# Altium PCB PCB1.PcbDoc (part 2 of 2)
Units mm, origin at the board's own origin, x right, y up, seen from the top; angles counter-clockwise.
Board outline 88.4 x 52.7 mm, 4 copper layers (Top Layer, Mid-Layer 1, Mid-Layer 2, Bottom Layer), stack 1.341 mm thick; 54 components, 31 nets, 188 pads, 80 vias.
Unrouted connection lines stored in the file: 1.
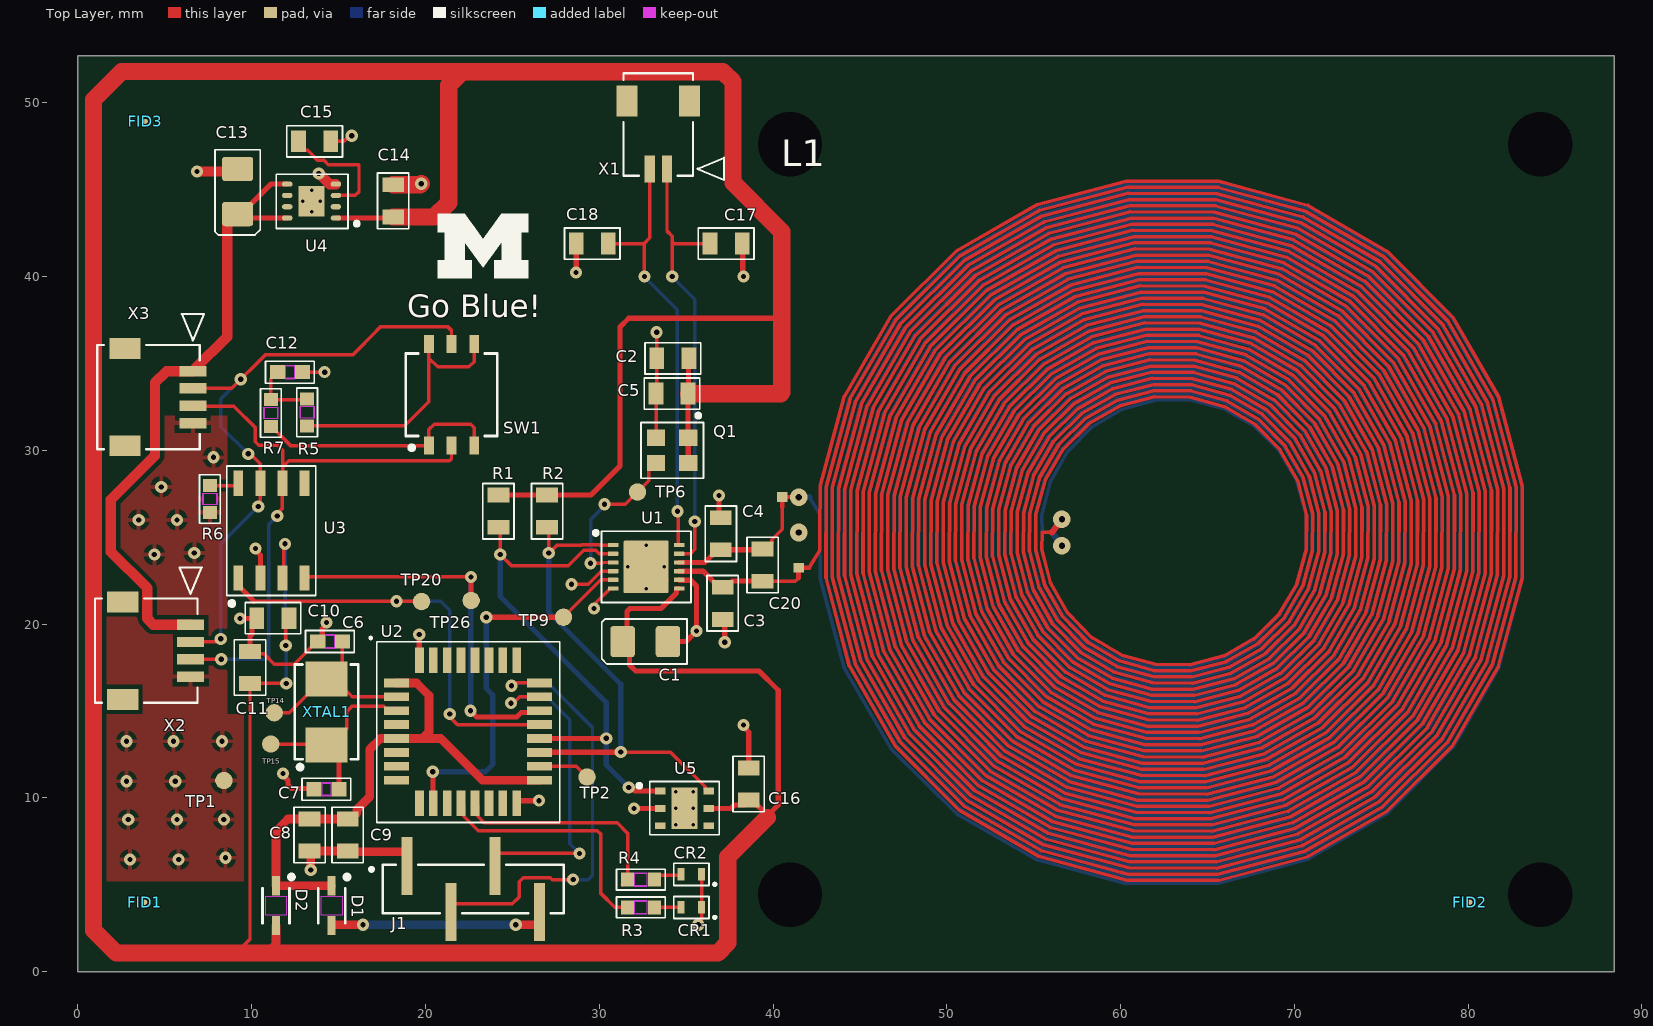
[diagram p0: Top Layer view]

## Part data (continued)
U4: library part TPS73733QDRBRQ1, "Automotive 1-A, ultra-low-dropout voltage regulator with reverse current protection & enable", Case/Package=SON, Dropout Voltage=130mV, LCSC Part#=C523768, Manufacturer="Texas Instruments", Max Operating Temperature=125°C, Max Output current=1A, Max Output Voltage=3.3V, Max Power Dissipation=2.5W, Max Supply Voltage=5.5V, Min Current Limit=1.05A, Min Input Voltage=2.2V, Min Operating Temperature=-40°C, Output Voltage Accuracy=1%, Package Quantity=1, Quiescent Current=300uA, Supplier Part Number=296-24157-1-ND, Accuracy=3%, Category="Voltage Regulators - Linear", ComponentLink1Description=https://datasheet.ciiva.com/2045/tps73719-q1-2045686.pdf?src-supplier=Digi-Key, ComponentLink1URL=https://datasheet.ciiva.com/2045/tps73719-q1-2045686.pdf?src-supplier=Digi-Key, ComponentLink2Description=https://datasheet.ciiva.com/3224/tps73733-q1-3224372.pdf?src-supplier=Avnet, ComponentLink2URL=https://datasheet.ciiva.com/3224/tps73733-q1-3224372.pdf?src-supplier=Avnet, ComponentLink3Description=https://datasheet.ciiva.com/4888/sbvs123-125968-4888332.pdf?src-supplier=Mouser, ComponentLink3URL=https://datasheet.ciiva.com/4888/sbvs123-125968-4888332.pdf?src-supplier=Mouser, ComponentLink4Description=https://datasheet.ciiva.com/14277/sbvs123-14277182.pdf?src-supplier=Avnet, ComponentLink4URL=https://datasheet.ciiva.com/14277/sbvs123-14277182.pdf?src-supplier=Avnet, Height=1mm, Lead Free="Lead Free", Length=3mm, Manufacturer Part Number=TPS73733QDRBRQ1, Min Output Voltage=3.3V, Nominal Output Voltage=3.3V, Number of Outputs=1, Number of Regulators=1, Output Current=1A, Output Type=Fixed, Output Voltage=3.3V, Packaging="Tape and Reel", Pins=8, Polarity=Positive, Power Dissipation=2.5W, Pricing="1=2.06, 10=1.847, 25=1.7424, 100=1.4844, 250=1.3938, 500=1.21958, 1000=1.0105 (USD)", Radiation Hardening=No, Reach SVHC Compliant=No, RoHS=Yes, RoHS Compliant=Yes, Series="Automotive, AEC-Q100", Stock=24609, Supplier=Digi-Key, Thickness=880um, Width=3mm
U5: library part HDC1080DMBR, "SENSOR HUMI/TEMP 3.3V I2C 4% SMD", LCSC Part#=C82227, Manufacturer="Texas Instruments", Max Operating Temperature=125°C, Min Operating Temperature=-40°C, Supplier Part Number=296-46272-6-ND, Accuracy=2%, Category="Integrated Circuits (ICs)", ComponentLink1Description=http://www.ti.com/lit/ds/symlink/hdc1080.pdf?src-supplier=Digi-Key, ComponentLink1URL=http://www.ti.com/lit/ds/symlink/hdc1080.pdf?src-supplier=Digi-Key, ComponentLink2Description=http://www.ti.com/general/docs/suppproductinfo.tsp?distId=10&amp;gotoUrl=http%3A%2F%2Fwww.ti.com%2Flit%2Fgpn%2Fhdc1080&src-supplier=Digi-Key, ComponentLink2URL=http://www.ti.com/general/docs/suppproductinfo.tsp?distId=10&amp;gotoUrl=http%3A%2F%2Fwww.ti.com%2Flit%2Fgpn%2Fhdc1080&src-supplier=Digi-Key, Interface=I2C, Lead Free="Lead Free", Manufacturer Part Number=HDC1080DMBR, Mounting Technology="Surface Mount", Output Type=I2C, Packaging="Cut Tape", Pricing="1=3.68, 10=2.759, 25=2.4524, 50=2.3296, 100=2.2684, 500=1.90052, 1000=1.7779 (USD)", Response Time=15s, RoHS=Yes, RoHS Compliant=Yes, Sensor Type=Temperature, Series=-, Stock=8356, Supplier=Digi-Key
X1: library part 202396-0207, "Conn Shrouded Header (4 Sides) HDR 2 POS 1mm Solder RA Side Entry SMD Pico-Clasp™ T/R", Flammability Rating="UL94 V-0", Insulation Color=Natural, LCSC Part#=C585325, Manufacturer=Molex, Max Operating Temperature=105°C, Min Operating Temperature=-40°C, Supplier Part Number=WM26783CT-ND, Category="Headers and Wire Housings", ComponentLink1Description=http://datasheet.octopart.com/2023960207-Molex-datasheet-147952241.pdf?src-supplier=Digi-Key, ComponentLink1URL=http://datasheet.octopart.com/2023960207-Molex-datasheet-147952241.pdf?src-supplier=Digi-Key, ComponentLink2Description=https://www.molex.com/pdm_docs/sd/2023960207_sd.pdf?src-supplier=Digi-Key, ComponentLink2URL=https://www.molex.com/pdm_docs/sd/2023960207_sd.pdf?src-supplier=Digi-Key, ComponentLink3Description=http://datasheet.octopart.com/2023960207-Molex-datasheet-147952241.pdf?src-supplier=Newark, ComponentLink3URL=http://datasheet.octopart.com/2023960207-Molex-datasheet-147952241.pdf?src-supplier=Newark, ComponentLink4Description=http://datasheet.octopart.com/2023960207-Molex-datasheet-147952241.pdf?src-supplier=Farnell, ComponentLink4URL=http://datasheet.octopart.com/2023960207-Molex-datasheet-147952241.pdf?src-supplier=Farnell, ComponentLink5Description=http://datasheet.octopart.com/2023960207-Molex-datasheet-147952241.pdf?src-supplier=Avnet, ComponentLink5URL=http://datasheet.octopart.com/2023960207-Molex-datasheet-147952241.pdf?src-supplier=Avnet, ComponentLink6Description=http://datasheet.octopart.com/2023960207-Molex-datasheet-147952241.pdf?src-supplier=Arrow+Electronics, ComponentLink6URL=http://datasheet.octopart.com/2023960207-Molex-datasheet-147952241.pdf?src-supplier=Arrow+Electronics, ComponentLink7Description=http://datasheet.octopart.com/2023960207-Molex-datasheet-147952241.pdf?src-supplier=TTI, ComponentLink7URL=http://datasheet.octopart.com/2023960207-Molex-datasheet-147952241.pdf?src-supplier=TTI, ComponentLink8Description=http://datasheet.octopart.com/2023960207-Molex-datasheet-147952241.pdf?src-supplier=Electro+Sonic, ComponentLink8URL=http://datasheet.octopart.com/2023960207-Molex-datasheet-147952241.pdf?src-supplier=Electro+Sonic, ComponentLink9Description=https://datasheet.octopart.com/202396-0207-Molex-datasheet-134623761.pdf?src-supplier=TME, ComponentLink9URL=https://datasheet.octopart.com/202396-0207-Molex-datasheet-134623761.pdf?src-supplier=TME, Connector Type=Header, Contact Finish - Mating=GOLD, Contact Material=Bronze, Contact Shape=Square, Contact Type="Male Pin", Fastening Type=Latch, Insulation Material=Nylon, Manufacturer Part Number=202396-0207, Mounting Technology="Surface Mount", Number of Positions=2, Number of Rows=1, Packaging="Tape and Reel", Pricing="1=0.97, 10=0.804, 100=0.6698 (USD)", RoHS=No, Series="Pico-Clasp 202396", Stock=6710, Supplier=Digi-Key, Termination=Solder
X2 X3: library part 202396-0407, "Conn Shrouded Header (4 Sides) HDR 4 POS 1mm Solder RA SMD Pico-Clasp™ T/R", Flammability Rating="UL94 V-0", Insulation Color=Natural, Manufacturer=Molex, Max Operating Temperature=105°C, Min Operating Temperature=-40°C, Supplier Part Number=WM26785CT-ND, Category="Headers and Wire Housings", ComponentLink1Description=http://datasheet.octopart.com/202396-0407-Molex-datasheet-134623761.pdf?src-supplier=Avnet, ComponentLink1URL=http://datasheet.octopart.com/202396-0407-Molex-datasheet-134623761.pdf?src-supplier=Avnet, ComponentLink2Description=https://www.molex.com/pdm_docs/sd/2023960407_sd.pdf?src-supplier=Digi-Key, ComponentLink2URL=https://www.molex.com/pdm_docs/sd/2023960407_sd.pdf?src-supplier=Digi-Key, ComponentLink3Description=http://datasheet.octopart.com/202396-0407-Molex-datasheet-134623761.pdf?src-supplier=Digi-Key, ComponentLink3URL=http://datasheet.octopart.com/202396-0407-Molex-datasheet-134623761.pdf?src-supplier=Digi-Key, ComponentLink4Description=http://datasheet.octopart.com/202396-0407-Molex-datasheet-134623761.pdf?src-supplier=Farnell, ComponentLink4URL=http://datasheet.octopart.com/202396-0407-Molex-datasheet-134623761.pdf?src-supplier=Farnell, ComponentLink5Description=http://datasheet.octopart.com/202396-0407-Molex-datasheet-134623761.pdf?src-supplier=Newark, ComponentLink5URL=http://datasheet.octopart.com/202396-0407-Molex-datasheet-134623761.pdf?src-supplier=Newark, ComponentLink6Description=http://datasheet.octopart.com/202396-0407-Molex-datasheet-134623761.pdf?src-supplier=Mouser, ComponentLink6URL=http://datasheet.octopart.com/202396-0407-Molex-datasheet-134623761.pdf?src-supplier=Mouser, ComponentLink7Description=http://datasheet.octopart.com/202396-0407-Molex-datasheet-134623761.pdf?src-supplier=Heilind+Electronics, ComponentLink7URL=http://datasheet.octopart.com/202396-0407-Molex-datasheet-134623761.pdf?src-supplier=Heilind+Electronics, ComponentLink8Description=http://datasheet.octopart.com/202396-0407-Molex-datasheet-134623761.pdf?src-supplier=Electro+Sonic, ComponentLink8URL=http://datasheet.octopart.com/202396-0407-Molex-datasheet-134623761.pdf?src-supplier=Electro+Sonic, Connector Type=Header, Contact Finish - Mating=GOLD, Contact Material=Bronze, Contact Shape=Square, Contact Type="Male Pin", Fastening Type=Latch, Insulation Material=Nylon, Manufacturer Part Number=202396-0407, Mounting Technology="Surface Mount", Number of Positions=4, Number of Rows=1, Packaging="Tape and Reel", Pricing="1=1.05, 10=0.869, 100=0.7238 (USD)", RoHS=No, Series="Pico-Clasp 202396", Stock=4338, Supplier=Digi-Key, Termination=Solder
XTAL1: library part XC53G2-8.000-F12NJHP, "CRYSTAL 8MHZ 12PF SMD", LCSC Part#=C2842269, Mfr_Name=HCI, Copyright="Copyright (C) 2023 Ultra Librarian. All rights reserved.", Manufacturer_Part_Number=XC53G2-8.000-F12NJHPK, RefDes=RefDes, Type=DEV

## Free pads (board coordinates)
  round 0 hole 3.7 unplated paste-5: MTH1(40.975,4.43) MTH1(40.975,47.61) MTH1(84.155,4.43) MTH1(84.155,47.61)

## Via types
v1: diameter 0.7, hole 0.3, Top Layer to Bottom Layer, 72 vias
v2: diameter 1.016/1.016/1.016/1.016 (per signal layer), hole 0.356, Top Layer to Bottom Layer, 4 vias
v3: diameter 0.3, hole 0.2, Top Layer to Bottom Layer, 4 vias

## Nets (pads, with @x,y where several pads share a name; then routed paths per layer and width w, separated by ;. In a path a pad name is that pad's centre, name@x,y a point inside that pad or via, vN(x,y) a via of type N, cw(c..) or ccw(c..) an arc to the next point about the centre after c; other vN are vias at no path point)
GND: C1.2 C2.2 C3.2 C4.2 C5.2 C6.1 C7.1 C8.2 C9.2 C10.2 C11.2 C12.2 C13.2 C14.1 C15.2 C16.2 C17.2 C18.2 CR1.1 CR2.1 J1.1 Q1.2 R6.2 TP1.1 U1.4 U1.6 U1.8 U1.13 U2.16 U2.32 U3.2 U4.4 U4.9 U5.2 U5.7 X2.4 X3.4 | length 62.6
  Top Layer w0.2: C11.2 10.047,18.287 10.713,18.287 11.3,17.7 12.456,17.7 13.756,19 C6.1 ; C12.2 v1(14.2,34.5) ; C15.2 15.311,47.784 15.626,48.099 v1(15.761,48.099) ; v1(28.4,22.3) 29.361,22.3 30.111,23.05 U1.4 ; v1(29.7,20.9) 29.796,20.996 29.796,21.221 30.625,22.05 U1.6 ; U1.13 33.1,23.3 U1.13@33.877,22.523 ; Q1.2 33.275,33.258 C5.2 33.312,33.313 C2.2 33.304,35.303 v1(33.304,36.8) ; U1.13@33.747,22.394 U1.13@33.877,22.523 ; U1.13@33.9,22.55 33.877,22.527 U1.13@33.877,22.523 ; v1(35.7,2.7) 35.7,2.835 35.897,3.032 CR2.1 ; C4.2@36.9,26.225 C4.2 ; C3.2 C3.2@37.221,20.154
  Top Layer w0.3: v1(9.332,20.319) C10.2@10.278,20.319 ; C11.2 9.905,19.304 10.024,19.423 10.024,20.065 C10.2@10.278,20.319 ; v1(10.22,24.353) 10.22,24.245 10.504,23.961 U3.2 ; C10.2 C10.2@10.278,20.319 ; v1(11.8,11.4) 11.8,11.292 12.089,11.003 12.089,10.742 12.287,10.544 C7.1@13.567,10.544 ; C6.1@13.851,18.928 14.058,19.135 14.058,19.75 14.3,19.992 v1(14.3,20.1) ; v1(19.639,19.4) 19.645,19.394 19.645,17.938 U2.32 ; U2.16 25.25,9.739 25.354,9.843 v1(26.542,9.843) ; v1(28.661,40.233) 28.675,40.247 C18.2 ; v1(32,9.4) U5.2 ; C1.2 35,19 v1(35.6,19.6) 35.6,22.2 35.275,22.525 34.855,22.525 34.625,22.525 U1.8 ; C4.2@36.9,26.225 v1(36.9,27.4) ; v1(37.221,18.961) C3.2@37.221,20.154 ; C17.2 38.262,41.862 38.262,40.037 v1(38.3,40) ; v1(38.3,14.2) 38.3,14.092 38.6,13.792 C16.2
  Top Layer w0.5: v1(13.4,5.85) 13.4,6.878 C8.2 C9.2@15.521,6.945 ; C9.2 15.566,6.9 18.8,6.9 18.935,6.765 J1.1
  Top Layer w0.6: v1(6.856,46.041) 6.86,46.045 C13.2@9.087,46.045 ; v1(13.857,45.931) 13.884,45.931 14.496,45.319 U4.4
  Top Layer w1: C14.1 19.699,45.281 v1(19.763,45.345)
  other v1: 3,6.459 5.8,6.459 8.5,6.559 2.9,8.759 5.7,8.759 8.4,8.759 2.8,10.959 5.6,10.959 2.8,13.259 5.5,13.259 8.3,13.259 4.4,24 6.7,24.1 3.5,26 5.7,26 4.8,27.9 7.8,29.6
  other v3: 32.7,22.05 31.65,23.3 33.744,23.309 32.7,24.55
NetC3_1: C3.1 C20.1 U1.9 | length 7.5
  Top Layer w0.203: C3.1@36.9,22.125 C3.1 37.3,22.125 C3.1@37.65,22.475 ; C20.1 41.278,22.475 41.474,22.672
  Top Layer w0.3: U1.9 35.975,23.05 C3.1@36.9,22.125 ; C3.1@37.65,22.475 C20.1
NetC4_1: C4.1 C20.2 L1.1 U1.10 | length 8.1
  Top Layer w0.2: C4.1@36.8,24.275 C4.1 ; C20.2@39.35,24.275 C20.2 39.6,24.325 39.925,24.65 39.925,24.85 40.541,25.466 40.541,26.737
  Top Layer w0.3: U1.10 36.075,23.55 C4.1@36.8,24.275 ; C4.1 C20.2@39.35,24.275
  other v2: 56.621,26.035
NetC6_2: C6.2 TP14.1 U2.2 XTAL1.2 | length 11
  Top Layer w0.2: TP14.1 12.165,14.9 14.112,16.847 XTAL1.2 14.321,16.847 15.221,17.747 C6.2 ; XTAL1.2@14.662,16.497 14.556,16.392 14.312,16.392 14.565,16.139 15.477,16.139 15.789,15.827 18.326,15.827 U2.2
NetC7_2: C7.2 TP15.1 U2.3 XTAL1.1 | length 11.7
  Top Layer w0.2: TP15.1 14.259,13.1 XTAL1.1 ; XTAL1.1@15.021,12.338 XTAL1.1 ; XTAL1.1@15.328,13.755 14.565,13.755 14.312,13.502 XTAL1.1 ; XTAL1.1@15.466,13.962 15.466,14.958 15.772,15.264 17.611,15.264 17.858,15.018 U2.3
  Top Layer w0.3: C7.2 XTAL1.1@15.021,12.338
NetC12_1: C12.1 R5.2 R7.1 | length 3.8
  Top Layer w0.2: C12.1 11.456,34.5 11.15,34.194 11.15,34.171 11.107,34.128 R7.1 13.155,32.921 R5.2
NetC13_1: C13.1 U4.5 U4.8 X2.1 X3.1 | length 37.1
  Top Layer w0.3: C13.1@9.387,43.595 11.111,45.319 U4.5 ; C13.1@9.413,43.369 U4.8
  Top Layer w0.6: X2.1 4.34,19.974 3.989,20.325 3.989,22.081 1.9,24.17 1.9,27.161 4.437,29.698 4.437,33.879 5.122,34.564 X3.1 ; X3.1@6.764,34.712 8.6,36.548 8.6,43.195 9,43.595 C13.1 ; C13.1@9.387,43.595 C13.1 ; C13.1@9.413,43.369 C13.1
NetC15_1: C15.1 U4.3 | length 7.2
  Top Layer w0.2: C15.1 12.696,47.584 13.021,47.259 13.221,47.259 13.799,46.681 14.168,46.681 14.406,46.443 16.177,46.443 16.177,44.877 15.969,44.669 U4.3 U4.3@14.866,44.65
NetC17_1: C17.1 U1.11 X1.1 | length 26.1
  Top Layer w0.2: X1.1 33.9,42.625 34.206,42.319 34.206,42.017 34.324,41.9 C17.1 ; v1(34.2,40) 34.2,42.319 ; U1.11 35.25,24.05 35.5,24.3 v1(35.5,25.9)
  Bottom Layer w0.2: v1(34.2,40) 35.5,38.7 v1(35.5,25.9)
NetC18_1: C18.1 U1.12 X1.2 | length 25.5
  Top Layer w0.2: C18.1@30.85,41.375 30.525,41.7 C18.1 32.575,41.9 ; v1(32.6,40) 32.6,41.875 32.575,41.9 ; X1.2@32.779,46.079 X1.2 32.9,42.225 32.575,41.9 ; v1(34.5,26.5) 34.55,26.45 34.55,24.575 34.575,24.55 U1.12
  Bottom Layer w0.2: v1(32.6,40) 34.5,38.1 v1(34.5,26.5)
NetCR1_2: CR1.2 R3.2 | length 1.5
  Top Layer w0.2: R3.2 CR1.2
NetCR2_2: CR2.2 R4.2 | length 1.7
  Top Layer w0.2: R4.2 33.433,5.561 34.664,5.561 CR2.2
NetJ1_2: J1.2 U2.24 | length 25.8
  Top Layer w0.2: J1.2 21.475,3.682 21.692,3.9 25,3.9 25.4,4.3 25.4,5.183 25.633,5.416 27.181,5.416 27.297,5.3 v1(28.5,5.3) ; v1(24.945,16.454) 25.08,16.454 25.244,16.618 U2.24
  Bottom Layer w0.2: v1(24.945,16.454) 25.08,16.454 25.246,16.62 27.047,16.62 29.613,14.054 29.613,5.544 29.369,5.3 v1(28.5,5.3)
NetJ1_3: J1.3 U2.23 | length 19.2
  Top Layer w0.2: J1.3 24.015,6.588 24.232,6.805 v1(28.863,6.805) ; v1(24.92,15.454) 25.055,15.454 25.419,15.819 U2.23@26.564,15.819
  Bottom Layer w0.2: v1(24.92,15.454) 25.055,15.454 25.42,15.819 26.981,15.819 28.305,14.495 28.305,7.363 v1(28.863,6.805)
NetQ1_3: Q1.3 TP6.1 U1.3 | length 9.4
  Top Layer w0.2: v1(29.5,23.5) 30.153,23.5 30.2,23.547 30.797,23.547 U1.3 ; v1(30.3,26.9) 31.5,26.9 TP6.1 32.854,28.254 32.854,28.906 33.224,29.276 Q1.3
  Bottom Layer w0.2: v1@29.516,23.516 v1(29.5,23.5) 29.5,26 30.3,26.8 v1(30.3,26.9)
NetR1_2: R1.2 U1.2 U2.20 U5.1 | length 31
  Top Layer w0.2: R1.2 24.3,25.475 v1(24.3,24) 24.95,23.35 28.219,23.35 29.119,24.25 29.811,24.25 30.011,24.05 U1.2 ; v1(31.7,10.6) 31.835,10.6 32.035,10.4
  Top Layer w0.3: U2.20 30.389,13.418 v1(30.4,13.429) ; 32.035,10.4 U5.1
  Bottom Layer w0.3: v1(24.3,24) 24.3,21.6 30.4,15.5 v1(30.4,13.429) 30.4,11.9 v1(31.7,10.6)
NetR2_2: R2.2 U1.1 U2.19 U5.6 | length 29.4
  Top Layer w0.2: R2.2 27.1,25.475 v1(27.1,24.1) 27.119,24.1 27.569,24.55 28.956,24.55 28.983,24.577 30.017,24.577 30.044,24.55 U1.1 ; v1(31.242,12.64) 34.1,12.64 36.1,10.64 36.1,10.617 36.1,10.5 36.2,10.4 U5.6
  Top Layer w0.3: U2.19 26.576,12.629 31.231,12.629 v1(31.242,12.64)
  Bottom Layer w0.3: v1(27.1,24.1) 27.1,20.683 31.243,16.54 31.243,12.641 v1(31.242,12.64)
NetR3_1: R3.1 U2.12 | length 14.4
  Top Layer w0.2: U2.12 22.204,9.55 22.204,8.941 23.034,8.11 29.89,8.11 30.1,7.9 30.1,4.5 30.9,3.7 R3.1
NetR4_1: R4.1 U2.13 | length 13
  Top Layer w0.2: U2.13 23.004,9.55 23.004,8.941 23.37,8.574 31.026,8.574 31.628,7.972 R4.1 31.628,5.272 31.35,4.994 R4.1@31.322,4.994
NetR5_1: R5.1 SW1.4 SW1.6 | length 14.9
  Top Layer w0.2: R5.1 18.811,31.411 20.2,32.8 20.2,35.3 ; SW1.6 20.2,35.3 ; SW1.4 22.8,35.1 22.5,34.8 20.7,34.8 20.2,35.3
NetR6_1: R6.1 U3.8 | length 1.7
  Top Layer w0.2: R6.1 9.106,27.972 U3.8
NetR7_2: R7.2 SW1.1 SW1.3 | length 14.3
  Top Layer w0.2: R7.2 11.135,31.377 12.233,30.279 SW1.1 20.2,31.2 20.5,31.5 22.6,31.5 22.8,31.3 SW1.3
NetSW1_2: SW1.2 U3.6 X2.3 X3.3 | length 34.1
  Top Layer w0.2: X2.3 6.494,17.979 v1(8.253,17.979) ; X3.3 6.642,32.538 8.98,32.538 10.2,31.318 10.2,30.5 10.4,30.3 11.5,30.3 11.8,30 11.8,29.063 ; v1(11.468,26.228) 11.468,26.363 11.774,26.669 U3.6 11.8,28.126 11.8,29.063 ; SW1.2 21.5,29.517 21.383,29.4 12.137,29.4 11.8,29.063
  Bottom Layer w0.2: v1(8.253,17.979) 10.817,17.979 10.996,18.158 10.996,25.756 v1(11.468,26.228)
NetSW1_5: SW1.5 U3.7 X2.2 X3.2 | length 36.4
  Top Layer w0.2: X2.2 7.908,18.974 8.088,19.154 v1(8.223,19.154) ; X3.2 8.845,33.564 10.772,35.49 15.813,35.49 17.2,36.877 17.2,36.9 17.4,37.1 21.3,37.1 21.5,36.9 SW1.5 ; v1(9.8,29.8) 9.929,29.8 10.504,29.225 U3.7 10.504,26.892 v1(10.383,26.771)
  Bottom Layer w0.2: v1(8.223,19.154) 8.223,24.611 v1(10.383,26.771) ; v1(9.368,34.096) 8.23,32.958 8.23,31.37 v1(9.8,29.8)
NetTP2_1: TP2.1 U2.18 | length 3
  Top Layer w0.2: U2.18 28.682,11.818 TP2.1
NetTP9_1: TP9.1 U1.5 U2.10 | length 22.3
  Top Layer w0.2: TP9.1 30.091,22.55 U1.5
  Top Layer w0.3: v1(20.419,11.506) 20.435,11.49 20.435,9.719 U2.10 ; v1(23.5,20.4) TP9.1
  Bottom Layer w0.3: v1(20.419,11.506) 23.449,11.506 23.873,11.93 23.873,15.924 23.5,16.297 v1(23.5,20.4)
NetTP20_1: TP20.1 U2.21 U3.1 | length 26.1
  Top Layer w0.2: 10.128,21.315 v1@18.325,21.315 ; v1@18.334,21.306 TP20.1@19.772,21.306 ; v1(21.403,14.835) 21.403,14.66 21.845,14.218 U2.21
  Top Layer w0.3: U3.1 9.234,22.209 10.128,21.315 ; v1@18.325,21.315 v1(18.327,21.313) v1@18.334,21.306 ; TP20.1@19.772,21.306 TP20.1
  Bottom Layer w0.2: v1(18.327,21.313) 20.891,21.313 21.403,20.801 v1(21.403,14.835)
NetTP26_1: TP26.1 U2.22 U3.4 | length 22.9
  Top Layer w0.2: U3.4@13.101,22.715 v1(22.623,22.715)
  Top Layer w0.3: U3.4 U3.4@13.101,22.715 ; v1(22.599,15.012) 22.957,14.654 25.251,14.654 25.511,14.914 26.461,14.914 U2.22 ; v1(22.623,22.715) 22.627,22.711 22.627,21.368 TP26.1
  Bottom Layer w0.3: v1(22.599,15.012) 22.611,15.024 22.611,22.703 v1(22.623,22.715)
VDD: C1.1 C2.1 C5.1 C10.1 C11.1 C14.2 C16.1 D2.2 Q1.1 Q1.4 R1.1 R2.1 U1.7 U3.3 U4.1 U5.5 | length 260.7
  Top Layer w0.2: 9.12,1.075 9.905,1.86 C11.1 9.912,16.586 v1(11.994,16.586) ; U3.3 11.845,22.729 11.845,24.55 v1(11.916,24.621) ; v1(11.962,18.773) 11.962,20.153 C10.1
  Top Layer w0.3: U4.1 18.083,43.369 C14.2 ; R1.1 R2.1 29.525,27.425 31.2,29.1 31.2,37.1 31.7,37.6 40.311,37.6 40.511,37.8 ; U1.7 34.475,22.05 34.45,22.025 34.45,21.793 33.557,20.9 31.776,20.9 31.6,20.724 31.6,19.25 C1.1 31.75,18.6 31.75,17.65 32.1,17.3 39.2,17.3 40.3,16.2 40.3,9.6 39.675,8.975 ; Q1.4 Q1.1 35.116,30.733 C5.1 35.139,33.29 35.139,35.272 C2.1 ; U5.5 37.575,9.4 37.775,9.6 38.325,9.6 C16.1 38.725,9.875 38.8,9.8 38.875,9.8 39.675,9 39.675,8.975 ; 39.675,8.875 39.675,8.975 ; 40.436,33.267 40.59,33.421
  Top Layer w0.5: 10.9,1.075 11.4,1.575 D2.2
  Top Layer w1: C14.2 20.518,43.431 21.344,44.257 21.344,51.013 22.127,51.796 ; C5.1@35.139,33.267 40.436,33.267 ; 39.675,8.875 37.4,6.6 37.4,1.661 36.814,1.075 10.9,1.075 9.12,1.075 2.221,1.075 0.9,2.396 0.9,50.18 2.52,51.8 22.123,51.8 22.127,51.796 ; 40.511,33.342 40.511,37.8 40.511,42.589 37.7,45.4 37.7,51.21 37.114,51.796 22.127,51.796
  Bottom Layer w0.2: v1(11.916,24.621) 11.939,24.598 11.939,18.796 v1(11.962,18.773) 11.978,18.757 11.978,16.602 v1(11.994,16.586)
VDD_PROG: D1.2 J1.4 | length 12.6
  Top Layer w0.2: D1.2 D1.2@14.65,2.7 ; J1.4@26.337,2.7 26.555,2.917 J1.4
  Top Layer w0.5: D1.2@14.65,2.7 v1(16.4,2.7) ; v1(25.2,2.7) J1.4@26.337,2.7
  Bottom Layer w0.5: v1(16.4,2.7) v1(25.2,2.7)
VDD_uC: C8.1 C9.1 D1.1 D2.1 U2.1 U2.5 U2.17 | length 31.2
  Top Layer w0.5: D1.1 D2.1 11.4,8.1 12.091,8.791 C9.1 15.725,8.791 16.05,9.116 16.05,9.316 16.8,10.066 16.8,12.8 17.418,13.418 U2.5 19.801,13.418 ; U2.1 19.482,16.618 20.2,15.9 20.2,13.817 19.801,13.418 ; U2.17 23.282,11.018 20.882,13.418 19.801,13.418
pads on no net: FID1.2 FID2.2 FID3.2 L1.2 U2.4 U2.6 U2.7 U2.8 U2.9 U2.11 U2.14 U2.15 U2.25 U2.26 U2.27 U2.28 U2.29 U2.30 U2.31 U3.5 U4.2 U4.6 U4.7 U5.3 U5.4 X1.3 X1.4 X2.5 X2.6 X3.5 X3.6
copper on no net: | length 1.2
  Top Layer w0.254: 40.541,26.737 40.541,27.317
  Top Layer w0.3: 41.474,22.672 41.474,23.253
  other v2: 56.621,24.511 41.483,25.273 41.483,27.305

## Polygon pours and split planes (outlines as drawn)
GND on Top Layer "GND_L01_P002" (solid, remove dead copper, pour order 2): 1.6,5.2 8.6,5.2 8.6,30.938 8.6,32 8.5,32 1.6,32
GND on Top Layer "GND_L01_P004" (solid, pour order 4): 1.66,14.82 9.68,14.82 9.7,14.8 9.68,5.2 9.2,5.2 1.66,5.2
GND on Bottom Layer "GND" (solid, pour order 1): 0,52.771 40.854,52.771 40.854,0 0.237,0 0,0.237
GND on Mid-Layer 2 "GND_L03_P005" (solid, pour order 5): 0,52.771 40.854,52.771 40.854,0 0.237,0 0,0.237
GND on Mid-Layer 1 "GND_L02_P006" (solid, pour order 6): 0,52.771 40.854,52.771 40.854,0 0.237,0 0,0.237

## Silkscreen, mask and mechanical layers (free items; w line width, h text height)
Top Overlay:
  region: 1917 vertices and 0 holes, not listed, extent 20.719,39.891 25.91,43.604
  text "Go Blue!" at 18.954,37.654 h1.3
FabNotes:
  drawing of 419 lines, arcs and shapes, not listed
  text "Layer" at 1.969,187.351 h1.52
  text "Name" at 12.38,187.351 h1.52
  text "Material" at 35.996,187.351 h1.52
  text "Thickness" at 57.834,187.351 h1.52
  text "Constant" at 74.34,187.351 h1.52
  text "Board Layer Stack" at 88.814,187.351 h1.52
  text "Top Overlay" at 12.38,184.303 h1.52
  text "Top Solder" at 12.38,181.255 h1.52
  text "Solder Resist" at 35.996,181.255 h1.52
  text "0.40mil" at 57.834,181.255 h1.52
  text "3.5" at 74.34,181.255 h1.52
  text "1" at 1.969,178.207 h1.52
  text "Top Layer" at 12.38,178.207 h1.52
  text "1.38mil" at 57.834,178.207 h1.52
  text "Dielectric 1" at 12.38,175.159 h1.52
  text "FR-4" at 35.996,175.159 h1.52
  text "15.75mil" at 57.834,175.159 h1.52
  text "4.8" at 74.34,175.159 h1.52
  text "2" at 1.969,172.111 h1.52
  text "Mid-Layer 1" at 12.38,172.111 h1.52
  text "1.40mil" at 57.834,172.111 h1.52
  text "Dielectric3" at 12.38,169.063 h1.52
  text "FR-4" at 35.996,169.063 h1.52
  text "15.75mil" at 57.834,169.063 h1.52
  text "4.8" at 74.34,169.063 h1.52
  text "3" at 1.969,166.015 h1.52
  text "Mid-Layer 2" at 12.38,166.015 h1.52
  text "1.40mil" at 57.834,166.015 h1.52
  text "Dielectric2" at 12.38,162.967 h1.52
  text "FR-4" at 35.996,162.967 h1.52
  text "15.75mil" at 57.834,162.967 h1.52
  text "4.8" at 74.34,162.967 h1.52
  text "4" at 1.969,159.919 h1.52
  text "Bottom Layer" at 12.38,159.919 h1.52
  text "1.38mil" at 57.834,159.919 h1.52
  text "Bottom Solder" at 12.38,156.871 h1.52
  text "Solder Resist" at 35.996,156.871 h1.52
  text "0.40mil" at 57.834,156.871 h1.52
  text "3.5" at 74.34,156.871 h1.52
  text "Bottom Overlay" at 12.38,153.823 h1.52
Drill Drawing:
  circle w0.254: c2.556,67.9 r0.847
  lines w0.254: 1.709,63.667 2.133,63.667 2.133,63.244 2.979,63.244 2.979,63.667 3.403,63.667 3.403,64.513 2.979,64.513 2.979,64.937 2.133,64.937 2.133,64.513 1.709,64.513 1.709,63.667 ; 1.709,71.287 2.133,71.287 2.556,70.864 2.979,71.287 3.403,71.287 2.979,71.71 3.403,72.133 2.979,72.133 2.556,72.557 2.133,72.133 1.709,72.133 2.133,71.71 1.709,71.287 ; 1.709,74.674 3.403,74.674 3.403,76.367 1.709,76.367 1.709,74.674
  lines w0.381: 0.191,62.101 268.188,62.101 ; 0.191,77.341 268.188,77.341 ; 14.183,58.291 14.183,81.151 ; 27.895,58.291 27.895,81.151 ; 57.097,58.291 57.097,81.151 ; 69.946,58.291 69.946,81.151 ; 88.584,58.291 88.584,81.151 ; 126.673,58.291 126.673,81.151 ; 141.655,58.291 141.655,81.151 ; 160.598,58.291 160.598,81.151 ; 177.612,58.291 177.612,81.151 ; 199.297,58.291 199.297,81.151 ; 233.171,58.291 233.171,81.151 ; 0.191,58.291 268.188,58.291 268.188,81.151 0.191,81.151 0.191,58.291
  text "Symbol" at 2.476,78.484 h1.83
  text "Count" at 15.326,78.484 h1.83
  text "Hole Size" at 29.038,78.484 h1.83
  text "Plated" at 58.24,78.484 h1.83
  text "Hole Type" at 71.089,78.484 h1.83
  text "Drill Layer Pair" at 89.727,78.484 h1.83
  text "Via/Pad" at 127.816,78.484 h1.83
  text "Pad Shape" at 142.798,78.484 h1.83
  text "Template" at 161.741,78.484 h1.83
  text "Description" at 178.755,78.484 h1.83
  text "Hole Tolerance (+)" at 200.44,78.484 h1.83
  text "Hole Tolerance (-)" at 234.314,78.484 h1.83
  text "4" at 15.326,74.674 h1.52
  text "0.356mm (14.00mil)" at 29.038,74.674 h1.52
  text "PTH" at 58.24,74.674 h1.52
  text "Round" at 71.089,74.674 h1.52
  text "Top Layer - Bottom Layer" at 89.727,74.674 h1.52
  text "Via" at 127.816,74.674 h1.52
  text "Rounded" at 142.798,74.674 h1.52
  text "v102h36" at 161.741,74.674 h1.52
  text "4" at 15.326,70.864 h1.52
  text "3.700mm (145.67mil)" at 29.038,70.864 h1.52
  text "NPTH" at 58.24,70.864 h1.52
  text "Round" at 71.089,70.864 h1.52
  text "Top Layer - Bottom Layer" at 89.727,70.864 h1.52
  text "Pad" at 127.816,70.864 h1.52
  text "Rounded" at 142.798,70.864 h1.52
  text "c0hn370p-1" at 161.741,70.864 h1.52
  text "14" at 15.326,67.054 h1.52
  text "0.200mm (7.87mil)" at 29.038,67.054 h1.52
  text "PTH" at 58.24,67.054 h1.52
  text "Round" at 71.089,67.054 h1.52
  text "Top Layer - Bottom Layer" at 89.727,67.054 h1.52
  text "(Mixed)" at 127.816,67.054 h1.52
  text "Rounded" at 142.798,67.054 h1.52
  text "(Mixed)" at 161.741,67.054 h1.52
  text "72" at 15.326,63.244 h1.52
  text "0.300mm (11.81mil)" at 29.038,63.244 h1.52
  text "PTH" at 58.24,63.244 h1.52
  text "Round" at 71.089,63.244 h1.52
  text "Top Layer - Bottom Layer" at 89.727,63.244 h1.52
  text "Via" at 127.816,63.244 h1.52
  text "Rounded" at 142.798,63.244 h1.52
  text "v70h30" at 161.741,63.244 h1.52
  text "94 Total" at 15.326,59.434 h1.52

## Text inside footprints (layer, text, board x,y; h text height)
D1: FabNotes "*" at 13.965,4.738 h1.27 r270
D2: FabNotes "*" at 10.765,4.738 h1.27 r270
SW1: FabNotes "*" at 20.344,31.016 h1.27 r90
U2: FabNotes "*" at 19.008,16.383 h1.27
XTAL1: FabNotes "*" at 13.969,12.661 h1.27 r90